# Altium PCB protocol-bridge.PcbDoc
Units mil, origin at the board's own origin, x right, y up, seen from the top; angles counter-clockwise.
Board outline 986.69 x 718.67 mil, 2 copper layers (Top Layer, Bottom Layer); 6 components, 18 nets, 46 pads, 23 vias.
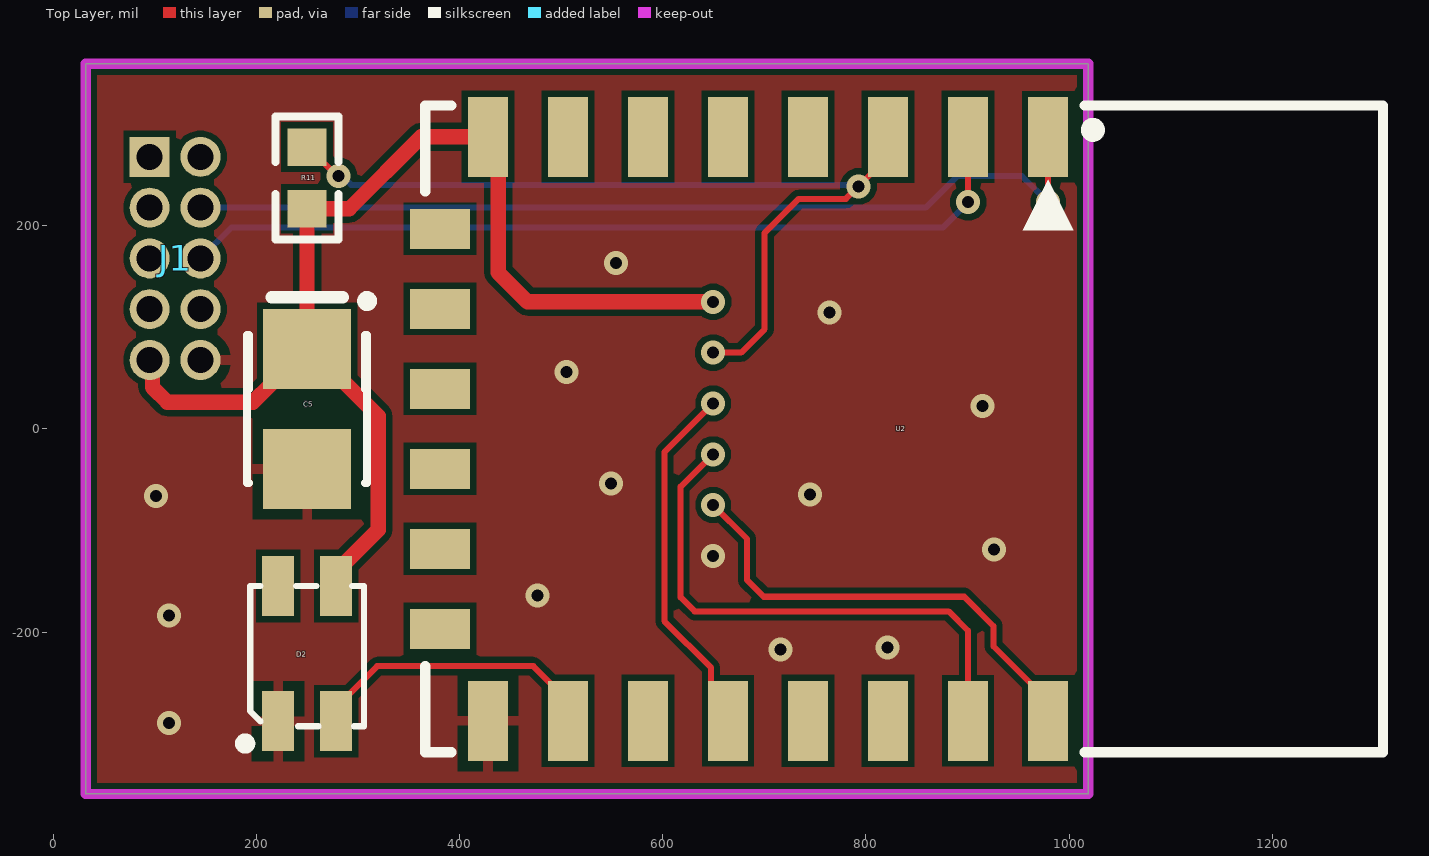
[diagram p0: Top Layer view]
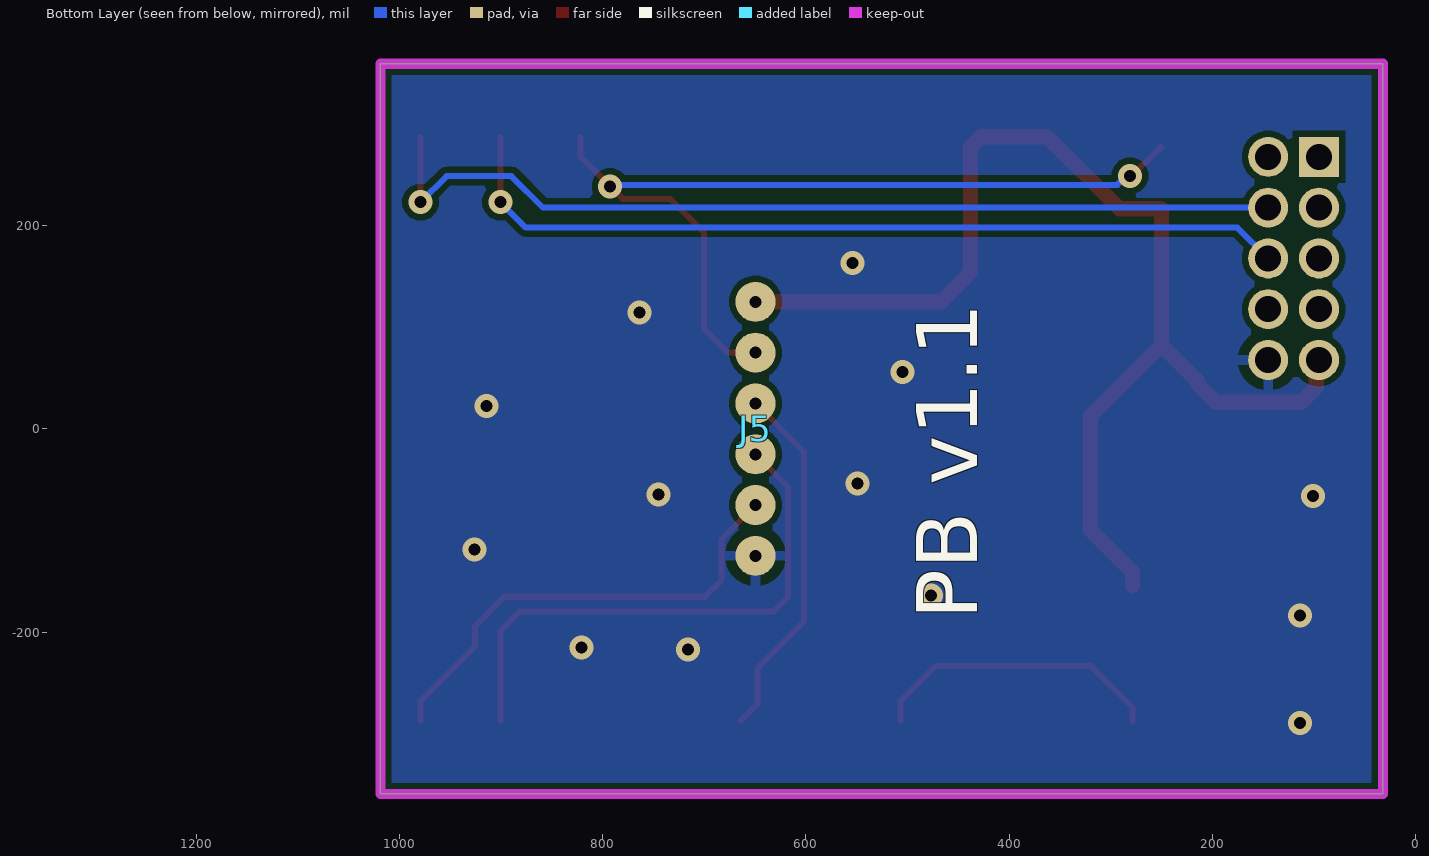
[diagram p1: Bottom Layer view, seen from below]
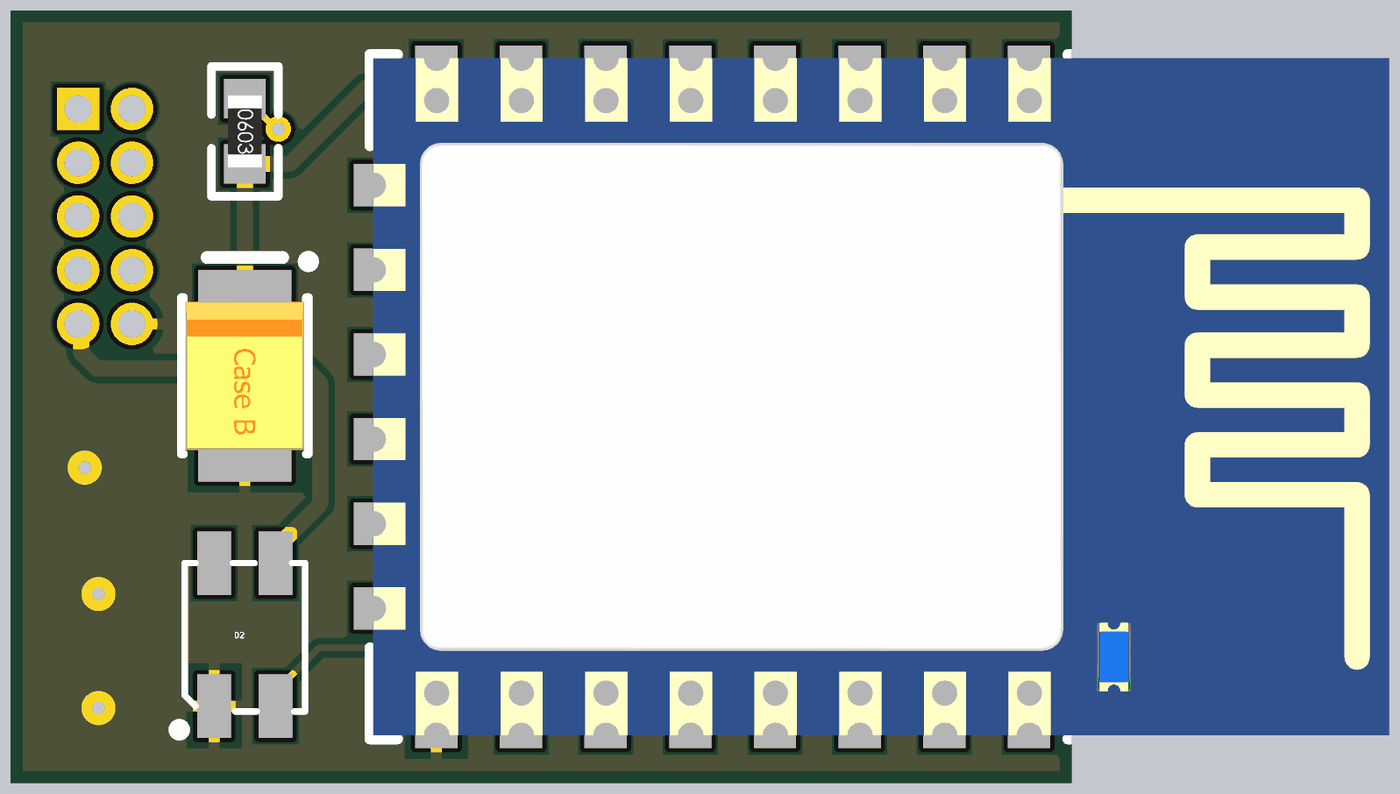
[diagram p2: 3D render of the assembled board from above, using the file's embedded part models]

## Layer stack, top to bottom
Top Solder: solder mask 0.4, Solder Resist, Dk 3.5
Top Layer: signal copper 1.4
Dielectric 1: dielectric 12.6, FR-4, Dk 4.8
Bottom Layer: signal copper 1.4
Bottom Solder: solder mask 0.4, Solder Resist, Dk 3.5

## Board outline
32.13,-359.33 1018.82,-359.33 1018.82,359.33 32.13,359.33

## Design rules (kind name [scope] priority, off if disabled: settings)
Clearance [All] p1: gap=6 ignorepadtopadclearanceinfootprint=FALSE
DiffPairsRouting [All] p1: maxlimit=10 minlimit=10 mostfreqgap=10 toplayer_minwidth=8 toplayer_maxwidth=15 toplayer_prefwidth=15 bottomlayer_minwidth=8 bottomlayer_maxwidth=15 bottomlayer_prefwidth=15 maxuncoupledlength=500
HoleSize [All] p1 off: absolutevalues=TRUE maxlimit=100 minlimit=1 maxpercent=80.000 minpercent=20.000
PolygonConnect [All] p1: thpad.connectstyle=Relief thpad.reliefconductorwidth=10 thpad.reliefentries=4 thpad.polygonreliefangle="90 Angle" thpad.airgapwidth=10 smdpad.connectstyle=Relief smdpad.reliefconductorwidth=10 smdpad.reliefentries=4 smdpad.polygonreliefangle="90 Angle" smdpad.airgapwidth=10 via.connectstyle=Direct via.reliefconductorwidth=10 via.reliefentries=4 via.polygonreliefangle="90 Angle" via.airgapwidth=10
RoutingVias [All] p1: holewidth=11.81 width=23.62 viastyle="Through Hole" minholewidth=11.81 minwidth=23.62 maxholewidth=11.81 maxwidth=23.62
SolderMaskExpansion [All] p1: expansion=4 istentingtop=FALSE
Width [All] p1: maxlimit=100 minlimit=6 preferedwidth=10
28 further rules are at their usual default settings.

## Components (designator, comment, footprint, x,y, rotation, side; value= is the part's Value field where it differs from the comment)
C5 "100uF TAJB107M006RNJ" SMT_C_Tantalum_B 250,19.53 r270 top
D2 "WS2812B" "LED 3528-4Pin" 250,-221.25 r90 top
J1 "Header 5X2" HEAD_1.27_5X2 120,167.76 r90 top
J5 "" HEADER_1.27_SMT_6X1 649.61,0 r270 bottom
R11 "4.7K" 0603_R 250,246.95 r270 top
U2 "ESP_C3_12F" ESP-C3-12F 680,0 r270 top locked

## Footprints (in the part's own frame and the unit in brackets; to place one, negate y for a bottom-side part, rotate by r counter-clockwise, add the part's x,y. Pads: shape width x height; smd on the part's side, far side on the other; paste and mask are expansions set on the pad)
0603_R [mm]
  rect 0.93x0.98 smd: 1(-0.77,0) 2(0.77,0)
  silkscreen extent -1.53,-0.79 1.54,0.79, body extent -0.85,-0.4 0.85,0.4, height 0.56
ESP-C3-12F [mm] "ESP-12 Wi-Fi Module by AI-Thinker"
  rect 2x1 smd: 1(-7.3,7.6) 2(-7.3,5.6) 3(-7.3,3.6) 4(-7.3,1.6) 5(-7.3,-0.4) 6(-7.3,-2.4) 7(-7.3,-4.4) 8(-7.3,-6.4) 15(7.3,-6.4) 16(7.3,-4.4) 17(7.3,-2.4) 18(7.3,-0.4) 19(7.3,1.6) 20(7.3,3.6) 21(7.3,5.6) 22(7.3,7.6)
  rect 1x1.5 smd: 9(-5,-7.6) 10(-3,-7.6) 11(-1,-7.6) 12(1,-7.6) 13(3,-7.6) 14(5,-7.6)
  silkscreen extent -8.08,-7.97 8.08,15.97, body extent -8,-7.89 8,16.11, height 2.75
HEAD_1.27_5X2 [mm]
  rect 1x1 hole 0.65: 1(2.54,0.635)
  round 1 hole 0.65: 2(2.54,-0.635) 3(1.27,0.635) 4(1.27,-0.635) 5(0,0.635) 6(0,-0.635) 7(-1.27,0.635) 8(-1.27,-0.635) 9(-2.54,0.635) 10(-2.54,-0.635)
HEADER_1.27_SMT_6X1 [mm]
  round 1 smd: 1(-3.175,0) 2(-1.905,0) 3(-0.635,0) 4(0.635,0) 5(1.905,0) 6(3.175,0)
"LED 3528-4Pin" [mm] "4脚，3528LED"
  rect 1.5x0.8 smd: 1(-1.689,0.725) 2(-1.689,-0.725) 3(1.689,-0.725) 4(1.689,0.725)
  silkscreen extent -2.37,-1.42 1.69,1.68, body extent -1.75,-1.4 1.75,1.4, height 1.95
SMT_C_Tantalum_B [mm] "Capacitor, SM Tantalum; Body 3.5 x 2.8 mm (LxW typ)"
  rect 2x2.2 smd: 1(-1.5,0) 2(1.5,0)
  silkscreen extent -2.82,-1.5 1.85,1.63, body extent -1.75,-1.4 1.75,1.4, height 1.9

## Part data
C5: library part SMT_C_Tantalum_B, "Capacitor, SM Tantalum; Body 3.5 x 2.8 mm (LxW typ)"
J1: "Header, 5-Pin, Dual row", Manufacturer="Generic Components", Class=Connector
J5: library part Header_6, "Header, 4-Pin", LatestRevisionDate=17-Jul-2002, LatestRevisionNote="Re-released for DXP Platform.", Publisher="Altium Limited"
R11: library part R0603, "Resistor", LatestRevisionDate=17-Jul-2002, LatestRevisionNote="Re-released for DXP Platform.", PackageDescription="Axial Device, Thru-Hole; 2 Leads; 0.3 in Pin Spacing", PackageReference=AXIAL-0.3, Published=8-Jun-2000, Publisher="Altium Limited"
U2: library part ESP32_C3_12F, "ESP-12 Wi-Fi Module by AI-Thinker", IC=ESP8266-EX, Vendor=Ai-thinker

## Via types
v1: diameter 23.62, hole 11.81, Top Layer to Bottom Layer, 23 vias

## Nets (pads, with @x,y where several pads share a name; then routed paths per layer and width w, separated by ;. In a path a pad name is that pad's centre, name@x,y a point inside that pad or via, vN(x,y) a via of type N, cw(c..) or ccw(c..) an arc to the next point about the centre after c; other vN are vias at no path point)
CHIP_EN: J5.2 R11.1 U2.3 | length 894.4
  Top Layer w6: v1(281.06,249.08) 279.17,249.08 R11.1@252.89,275.35 ; v1(649.61,75) 677.07,75 700.22,98.15 700.22,192.82 733.73,226.34 780.35,226.34 v1(792.7,238.69) 821.73,267.72 U2.3 ; R11.1@252.89,275.35 250.98,277.26 R11.1 251.91,275.35 R11.1@252.89,275.35
  Bottom Layer w6: v1(281.06,249.08) 284.51,249.08 293.39,240.2 v1@798.29,240.2
GND: C5.2 D2.1 J1.10 J5.6 U2.15
  other v1: 113.86,-289.55 715.92,-217.25 821.01,-215.29 113.86,-183.46 476.71,-163.88 649.61,-125 926.07,-118.6 101.02,-65.89 744.98,-64.54 549.02,-53.73 914.59,22.63 505.1,55.74 763.9,114.53 554.03,163.36
IO0: J1.4 U2.1 | length 922.1
  Top Layer w6: v1(979.37,223.08) U2.1@979.37,287.25
  Bottom Layer w6: J1.4 858.74,217.76 889.81,248.82 953.63,248.82 v1(979.37,223.08)
IO1: J1.6 U2.2 | length 842.9
  Top Layer w6: U2.2 900.62,287.25 v1(900.62,223.08)
  Bottom Layer w6: J1.6 175.37,198.13 875.67,198.13 v1(900.62,223.08)
IO2: U2.4
IO3: U2.5
IO4: U2.6
IO5: U2.7
IO6: U2.12
IO7: U2.13
IO8: D2.2 U2.16 | length 292.6
  Top Layer w6: D2.2 278.54,-273.97 318.99,-233.53 472.58,-233.53 506.77,-267.72 U2.16
IO9: J5.3 U2.18 | length 358.1
  Top Layer w6: v1(649.61,25) 601.71,-22.9 601.71,-189.31 647.56,-235.16 647.56,-270.72 U2.18
IO10: U2.17
IO18: U2.19
IO19: U2.20
RXD0: J5.4 U2.21 | length 539.3
  Top Layer w6: v1(649.61,-25) 617.62,-56.99 617.62,-165.86 631.39,-179.63 881.46,-179.63 900.47,-198.65 U2.21
TXD0: J5.5 U2.22 | length 464.5
  Top Layer w6: v1(649.61,-75) 682.99,-108.39 682.99,-148.84 699.41,-165.26 896.75,-165.26 925.56,-194.06 925.56,-214.06 979.21,-267.72 U2.22
VDD_3V3: C5.1 D2.3 J1.9 J5.1 R11.2 U2.8 | length 1198.1
  Top Layer w15: J1.9 97.78,64.98 97.78,40.87 112.36,26.29 196.81,26.29 214.19,43.67 214.19,46.72 246.06,78.59 C5.1 ; D2.3 278.54,-140.97 319.96,-99.55 319.96,12.57 253.94,78.59 C5.1 ; v1(649.61,125) 466.94,125 438.06,153.88 438.06,277.37 U2.8 362.2,287.4 291.43,216.63 R11.2 C5.1
pads on no net: D2.4 J1.1 J1.2 J1.3 J1.5 J1.7 J1.8 U2.9 U2.10 U2.11 U2.14

## Polygon pours and split planes (outlines as drawn)
GND on Bottom Layer "GND_L02_P001" (solid, remove dead copper, pour order 1): -133.85,699.8 -133.85,-678.2 1249.15,-678.2 1249.15,699.8
GND on Top Layer "GND_L01_P000" (solid, remove dead copper, pour order 0): -133.85,699.8 -133.85,-678.2 1249.15,-678.2 1249.15,699.8

## Keep-outs
Keep-Out Layer:
  the board outline again, w10

## Silkscreen, mask and mechanical layers (free items; w line width, h text height)
Bottom Overlay:
  text "PB v1.1" at 431.13,-187.74 h60 r270

## Text inside footprints (layer, text, board x,y; h text height)
U2: Mechanical 13 "ANTENNA AREA" at 1287.21,255.96 h10 r270; Mechanical 13 "CUTOUT POLYGON" at 1267.21,255.96 h10 r270